# Altium PCB MCU.PcbDoc (part 2 of 3)
Units mm, origin at the board's own origin, x right, y up, seen from the top; angles counter-clockwise.
Board outline 91.45 x 80 mm, 4 copper layers (Top Layer, Layer 1, Layer 2, Bottom Layer), stack 1.586 mm thick; 92 components, 37 nets, 225 pads, 313 vias.
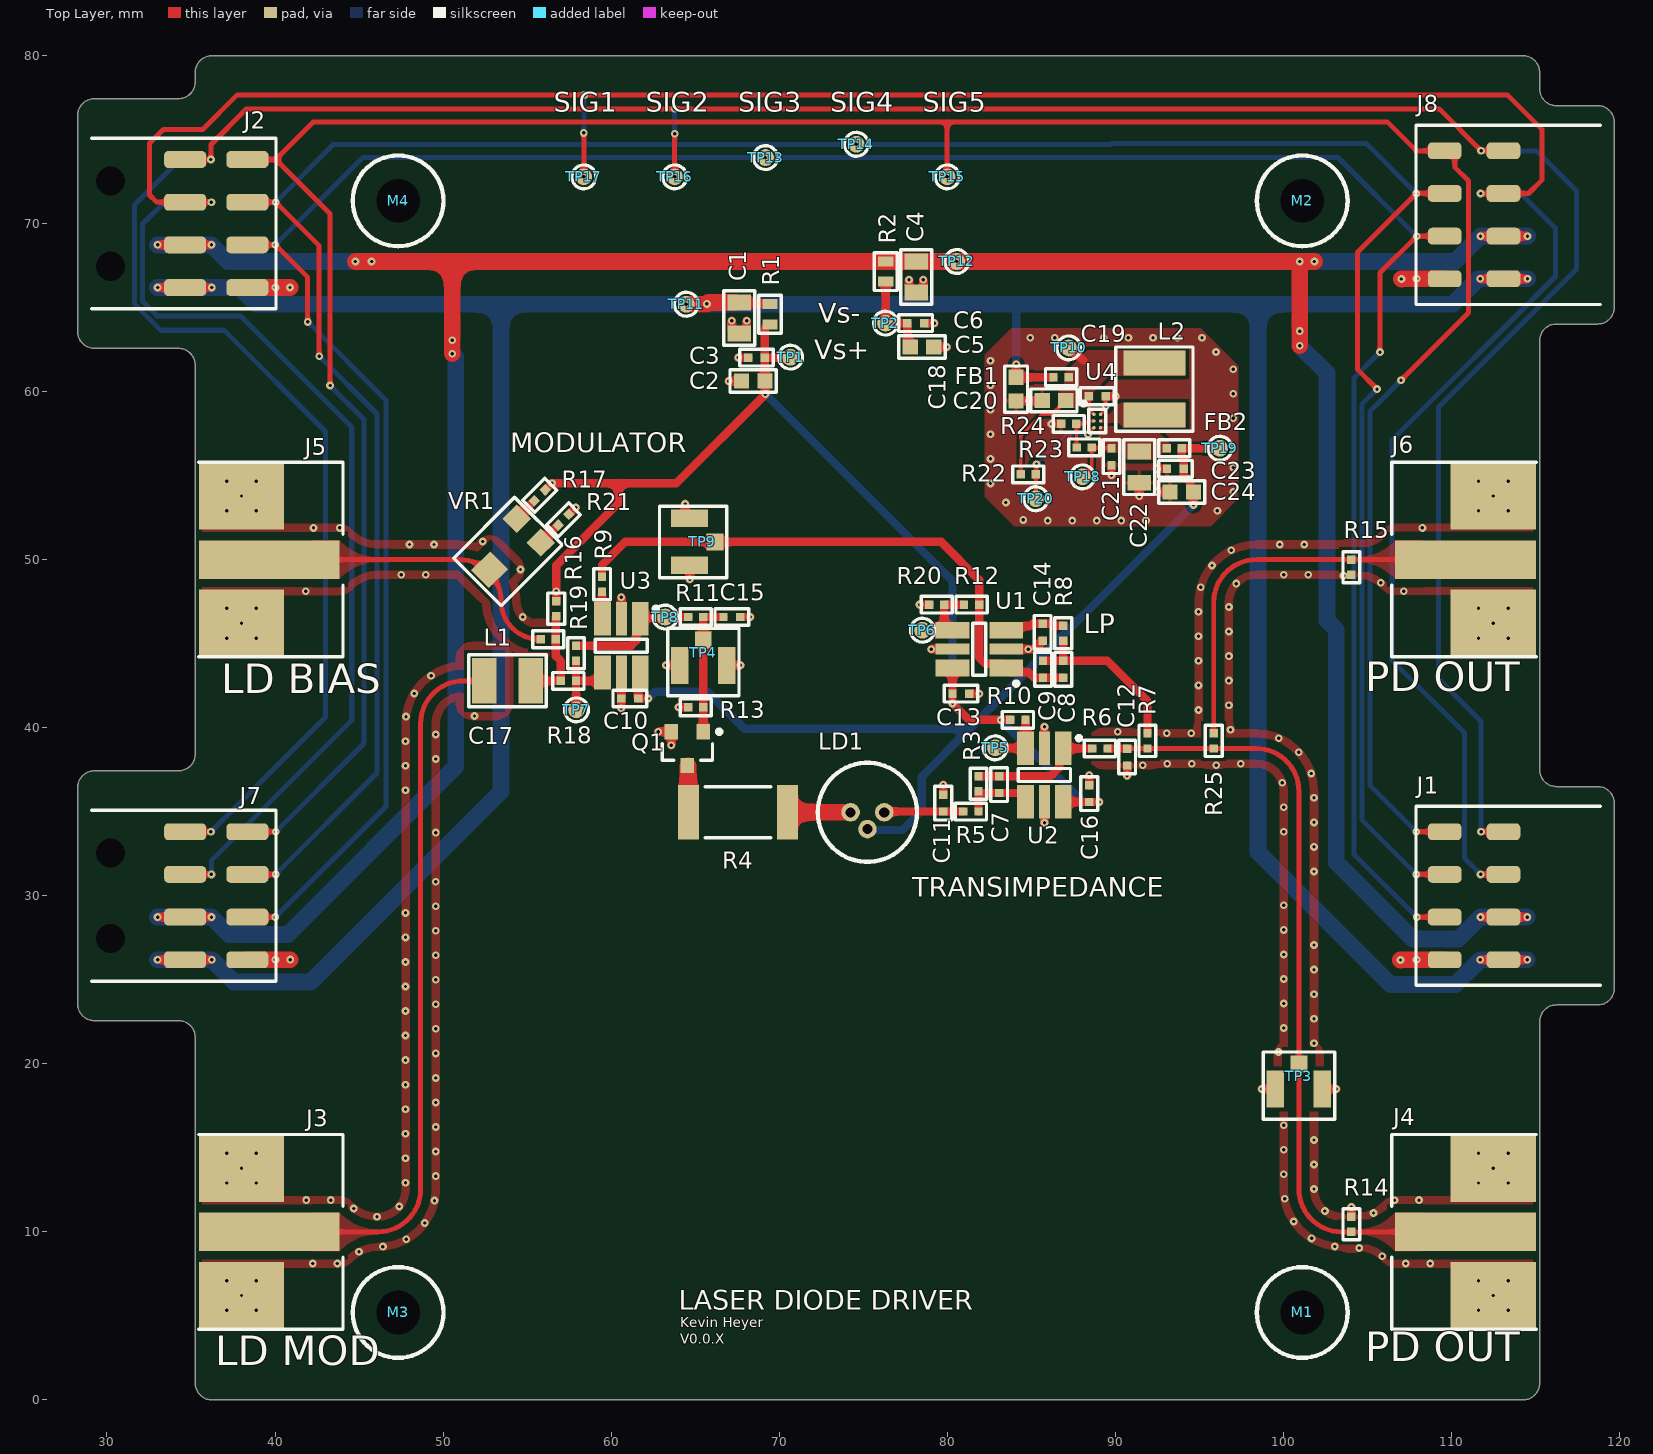
[diagram p0: Top Layer view]

## Part data (continued)
R10 R20: library part "RES 1k00 63mW 0402", "1 kOhms ¡À1% 0.063W, 1/16W Chip Resistor 0402 (1005 Metric) Moisture Resistant Thick Film", Case Code (Imperial)=0402, Case Code (Metric)=1005, Manufacturer=Yageo, Manufacturer Part Number=RC0402FR-071KL, Max Operating Temperature=155°C, Max Power Dissipation=63mW, Min Operating Temperature=-55°C, Power Rating=62.5mW, Resistance=1kR, Resistance Tolerance=1%, Resistor Type="Thick Film", Supplier Part Number 1=48Y4534, Temperature Coefficient=100ppm/°C, Voltage Rating=50V, Case/Package=0402, Category="Chip SMD Resistors", ComponentLink1Description=https://datasheet.ciiva.com/11819/0900766b80c66297-11819477.pdf?src-supplier=RSComponents, ComponentLink1URL=https://datasheet.ciiva.com/11819/0900766b80c66297-11819477.pdf?src-supplier=RSComponents, ComponentLink2Description=https://datasheet.ciiva.com/7983/1018594-7983502.pdf?src-supplier=Element14, ComponentLink2URL=https://datasheet.ciiva.com/7983/1018594-7983502.pdf?src-supplier=Element14, ComponentLink3Description=https://datasheet.ciiva.com/22747/1018594-22747513.pdf?src-supplier=Element14, ComponentLink3URL=https://datasheet.ciiva.com/22747/1018594-22747513.pdf?src-supplier=Element14, ComponentLink4Description=https://datasheet.ciiva.com/12666/pyu-rc0402-51-rohs-l-6-r-12666741.pdf?src-supplier=Mouser, ComponentLink4URL=https://datasheet.ciiva.com/12666/pyu-rc0402-51-rohs-l-6-r-12666741.pdf?src-supplier=Mouser, ComponentLink5Description=https://datasheet.ciiva.com/7849/1018594-7849869.pdf?src-supplier=Element14, ComponentLink5URL=https://datasheet.ciiva.com/7849/1018594-7849869.pdf?src-supplier=Element14, ComponentLink6Description=https://datasheet.ciiva.com/7849/1018594-7849871.pdf?src-supplier=Element14, ComponentLink6URL=https://datasheet.ciiva.com/7849/1018594-7849871.pdf?src-supplier=Element14, ComponentLink7Description=https://datasheet.ciiva.com/17063/pyu-rc0402-51-rohs-l-6-r-17063193.pdf?src-supplier=Future+Electronics, ComponentLink7URL=https://datasheet.ciiva.com/17063/pyu-rc0402-51-rohs-l-6-r-17063193.pdf?src-supplier=Future+Electronics, Construction=Rectangular, Depth=0.5mm, Features="Moisture Resistant", Height=0.32mm, Lead Free="Lead Free", Length=1mm, Military Standard=Not, Number of Pins=2, Number of Terminations=2, Packaging="Tape and Reel", Pricing 1="1=0.00100, 10000=0.00100 (USD)", Reach SVHC Compliant=Yes, RoHS=Yes, RoHS Compliant=Yes, Series=RC, Size Code=0402, Stock 1=3520000, Supplier 1=Newark, Technology="THICK FILM", Termination=SMD/SMT, Tolerance=1%, Voltage Rating (DC)=50V, Width=0.5mm
R11: library part "RES 100R 63mW 1% 0402", "Res General Purpose Thick Film 0402 100 Ohm 1% 1/16W ±100ppm/°C Molded SMD Paper T/R", Case Code (Imperial)=0402, Case Code (Metric)=1005, Manufacturer=Yageo, Manufacturer Part Number=RC0402FR-07100RL, Max Operating Temperature=155°C, Max Power Dissipation=63mW, Min Operating Temperature=-55°C, Power Rating=62.5mW, Resistance Tolerance=1%, Resistor Type="Thick Film", Supplier Part Number 1=45Y6897, Temperature Coefficient=100ppm/°C, Voltage Rating=50V, Case/Package=0402, Category="Chip SMD Resistors", ComponentLink1Description=https://datasheet.ciiva.com/11808/0900766b80c66297-11808765.pdf?src-supplier=RSComponents, ComponentLink1URL=https://datasheet.ciiva.com/11808/0900766b80c66297-11808765.pdf?src-supplier=RSComponents, ComponentLink2Description=https://datasheet.ciiva.com/7849/1784430-7849810.pdf?src-supplier=Element14, ComponentLink2URL=https://datasheet.ciiva.com/7849/1784430-7849810.pdf?src-supplier=Element14, ComponentLink3Description=https://datasheet.ciiva.com/28367/1018594-28367226.pdf?src-supplier=Element14, ComponentLink3URL=https://datasheet.ciiva.com/28367/1018594-28367226.pdf?src-supplier=Element14, ComponentLink4Description=https://datasheet.ciiva.com/22747/1018594-22747511.pdf?src-supplier=Element14, ComponentLink4URL=https://datasheet.ciiva.com/22747/1018594-22747511.pdf?src-supplier=Element14, ComponentLink5Description=https://datasheet.ciiva.com/12667/pyu-rc0402-51-rohs-l-6-r-12667957.pdf?src-supplier=Mouser, ComponentLink5URL=https://datasheet.ciiva.com/12667/pyu-rc0402-51-rohs-l-6-r-12667957.pdf?src-supplier=Mouser, ComponentLink6Description=https://datasheet.ciiva.com/15189/getdatasheetpartid-329466-15189335.pdf?src-supplier=Verical, ComponentLink6URL=https://datasheet.ciiva.com/15189/getdatasheetpartid-329466-15189335.pdf?src-supplier=Verical, ComponentLink7Description=https://datasheet.ciiva.com/16740/pyu-rc0402-51-rohs-l-6-r-16740566.pdf?src-supplier=Future+Electronics, ComponentLink7URL=https://datasheet.ciiva.com/16740/pyu-rc0402-51-rohs-l-6-r-16740566.pdf?src-supplier=Future+Electronics, Construction=Rectangular, Depth=0.5mm, Features="Moisture Resistant", Height=0.32mm, Lead Free="Lead Free", Length=1mm, Military Standard=Not, Number of Pins=2, Number of Terminations=2, Packaging="Tape and Reel", Pricing 1="1=0.00100, 10000=0.00100 (USD)", Reach SVHC Compliant=Yes, Resistance=100R, RoHS=Yes, RoHS Compliant=Yes, Series=RC, Size Code=0402, Stock 1=4390000, Supplier 1=Newark, Technology="THICK FILM", Termination=SMD/SMT, Tolerance=1%, Voltage Rating (DC)=50V, Width=0.5mm
R13 R16 R23: library part "RES 100k 1% 63mW 0402", "Res Thick Film 0402 100K Ohm 1% 0.063W ±100ppm/°C Molded SMD Paper T/R", Case Code (Imperial)=0402, Case Code (Metric)=1005, Manufacturer="Stackpole Electronics", Manufacturer Part Number=RMCF0402FT100K, Max Operating Temperature=155°C, Max Power Dissipation=63mW, Min Operating Temperature=-55°C, Power Rating=62.5mW, Resistance=100kR, Resistor Type="Thick Film", Temperature Coefficient=100ppm/°C, Tolerance=1%, Case/Package=0402, Category="Chip SMD Resistors", ComponentLink1Description=https://datasheet.ciiva.com/15193/getdatasheetpartid-482656-15193415.pdf?src-supplier=Verical, ComponentLink1URL=https://datasheet.ciiva.com/15193/getdatasheetpartid-482656-15193415.pdf?src-supplier=Verical, Construction=Rectangular, Contact Plating=Tin,Matte, Depth=0.5mm, Features="Automotive AEC-Q200", Height=0.016inch, Lead Free="Lead Free", Length=1mm, Military Standard=Not, Mount="Surface Mount", Number of Terminations=2, Packaging="Tape and Reel", Pricing 1="10000=0.00170, 20000=0.00168, 40000=0.00163, 60000=0.00160, 80000=0.00154, 100000=0.00150, 1000000=0.00146 (USD)", Radiation Hardening=No, RoHS=Yes, RoHS Compliant=Yes, Series=RMCF, Size Code=0402, Stock 1=3260000, Supplier 1=Avnet, Supplier Part Number 1=RMCF0402FT100K, Width=0.02inch
R14 R15: library part "RES GENERIC 0402"
R24: library part "RES 5k60 1% 63mW 0402", "Res Thick Film 0402 5.6K Ohm 1% 0.063W(1/16W) ±100ppm/C Epoxy SMD T/R", Case Code (Imperial)=0402, Case Code (Metric)=1005, Case/Package=Molded, Manufacturer=Yageo, Manufacturer Part Number=RC0402FR-075K6L, Max Operating Temperature=155°C, Min Operating Temperature=-55°C, Power Rating=62.5mW, Resistance=5.6kR, Resistance Tolerance=1%, Resistor Type="Thick Film", Supplier Part Number 1=12AC2081, Temperature Coefficient=100ppm/°C, Voltage Rating=50V, Category="Chip SMD Resistors", ComponentLink1Description=https://datasheet.ciiva.com/12667/pyu-rc0402-51-rohs-l-6-r-12667035.pdf?src-supplier=Mouser, ComponentLink1URL=https://datasheet.ciiva.com/12667/pyu-rc0402-51-rohs-l-6-r-12667035.pdf?src-supplier=Mouser, Construction=Rectangular, Depth=0.5mm, Lead Free="Lead Free", Length=1mm, Military Standard=Not, Packaging="Tape and Reel", Pricing 1="1=0.00100, 10000=0.00100 (USD)", RoHS=Yes, RoHS Compliant=Yes, Series=RC, Size Code=0402, Stock 1=100000, Supplier 1=Newark, Termination=SMD/SMT, Tolerance=1%
TP1 TP2 TP5 TP6 TP7 TP8 TP10 TP11 TP12 TP13 TP14 TP15 TP16 TP17 TP18 TP19 TP20: library part "TP 1mm", "SMT testpoint"
TP3 TP4 TP9: library part "TP U.FL", "CONN U.FL RCPT STR 50 OHM SMD", Case/Package=SMD/SMT, Dielectric Material=Polymer, Housing Color=Beige, Manufacturer=Hirose, Manufacturer Part Number=U.FL-R-SMT-1(80), Max Frequency=6GHz, Max Operating Temperature=90°C, Min Operating Temperature=-40°C, Package Quantity=10000, Body Material=Bronze, Body Plating=Silver, Category="RF / Coaxial Connectors", Center Contact Plating=Gold, ComponentLink1Description=http://www.mouser.com/ds/2/185/U.FL_catalog-939761.pdf?src-supplier=Mouser, ComponentLink1URL=http://www.mouser.com/ds/2/185/U.FL_catalog-939761.pdf?src-supplier=Mouser, ComponentLink2Description=https://www.hirose.com/product/en/download_file/key_name/U.FL-R-SMT-1%2880%29/category/Specification%20Sheet/doc_file_id/37638/?file_category_id=9&item_id=03310472280&is_series=&src-supplier=Digi-Key, ComponentLink2URL=https://www.hirose.com/product/en/download_file/key_name/U.FL-R-SMT-1%2880%29/category/Specification%20Sheet/doc_file_id/37638/?file_category_id=9&item_id=03310472280&is_series=&src-supplier=Digi-Key, Connector Type="Receptacle,Male Pin", Contact Material=Brass, Fastening Type=SNAP-ON, Impedance=50R, Lead Free="Lead Free", Mating Cycles=30, Mount="Surface Mount", Number of Ports=1, Packaging="Tape and Reel", Pricing 1="10000=0.81500, 20000=0.80000, 30000=0.78500 (USD)", RoHS=Yes, RoHS Compliant=Yes, Series=U.FL, Stock 1=40000, Supplier 1="Future Electronics", Termination=Solder
U1 U2 U3: library part "IC OPAMP SOT5/6-23 GENERIC", Case/Package=SOT, Category="Amplifiers - Op Amps, Buffer, Instrumentation", Mount="Surface Mount", Number of Channels=1, Number of Circuits=1, Number of Pins=6, RoHS=Yes, RoHS Compliant=Yes
U4: library part "IC REG BOOST 28V 1A2 TPS61046YFFR", "28-V Output Voltage Boost Converter in WCSP Package 6-DSBGA -40 to 125", Manufacturer="Texas Instruments", Max Operating Temperature=85°C, Min Operating Temperature=-40°C, Quiescent Current=110uA, Supplier Part Number 1=296-44337-1-ND, Category="Voltage Regulators - Switching", ComponentLink1Description=http://www.ti.com/lit/ds/symlink/tps61046.pdf?src-supplier=Digi-Key, ComponentLink1URL=http://www.ti.com/lit/ds/symlink/tps61046.pdf?src-supplier=Digi-Key, ComponentLink2Description=http://www.ti.com/general/docs/suppproductinfo.tsp?distId=10&amp;gotoUrl=http%3A%2F%2Fwww.ti.com%2Flit%2Fgpn%2Ftps61046&src-supplier=Digi-Key, ComponentLink2URL=http://www.ti.com/general/docs/suppproductinfo.tsp?distId=10&amp;gotoUrl=http%3A%2F%2Fwww.ti.com%2Flit%2Fgpn%2Ftps61046&src-supplier=Digi-Key, ComponentLink3Description=http://www.ti.com/general/docs/lit/getliterature.tsp?genericPartNumber=TPS61046&&fileType=pdf&src-supplier=Avnet, ComponentLink3URL=http://www.ti.com/general/docs/lit/getliterature.tsp?genericPartNumber=TPS61046&&fileType=pdf&src-supplier=Avnet, Lead Free="Lead Free", Manufacturer Part Number=TPS61046YFFR, Pricing 1="1=1.29000, 10=1.15700, 25=1.09800, 100=0.90210, 250=0.84324, 500=0.74518, 1000=0.58830 (USD)", RoHS=Yes, RoHS Compliant=Yes, Stock 1=82158, Supplier 1=Digi-Key, Topology=Boost
VR1: library part "RES POT 20k 1T 0.1W", "Res Trimmer 20K Ohm 25% 1/10W 1(Elec)/1(Mech)Turn (3 X 3.8mm) Foot Print SMD Embossed T/R", Manufacturer=Bourns, Manufacturer Part Number=TC33X-2-203E, Max Operating Temperature=100°C, Max Power Dissipation=100mW, Min Operating Temperature=-40°C, Package Quantity=2500, Resistance=20kR, Resistance Tolerance=25%, Resistor Type=Cermet, Supplier Part Number 1=TC33X-2-203ECT-ND, Temperature Coefficient=250ppm/°C, Category="Variable Resistors and Potentiometers", ComponentLink1Description=https://datasheet.ciiva.com/22671/1537288-22671216.pdf?src-supplier=Element14, ComponentLink1URL=https://datasheet.ciiva.com/22671/1537288-22671216.pdf?src-supplier=Element14, ComponentLink2Description=https://datasheet.ciiva.com/11833/0900766b802749b3-11833400.pdf?src-supplier=RSComponents, ComponentLink2URL=https://datasheet.ciiva.com/11833/0900766b802749b3-11833400.pdf?src-supplier=RSComponents, ComponentLink3Description=https://datasheet.ciiva.com/6227/tc33-6227117.pdf?src-supplier=Digi-Key, ComponentLink3URL=https://datasheet.ciiva.com/6227/tc33-6227117.pdf?src-supplier=Digi-Key, ComponentLink4Description=https://datasheet.ciiva.com/6227/tc33-6227118.pdf?src-supplier=Digi-Key, ComponentLink4URL=https://datasheet.ciiva.com/6227/tc33-6227118.pdf?src-supplier=Digi-Key, ComponentLink5Description=https://datasheet.ciiva.com/6227/tc33-6227119.pdf?src-supplier=Digi-Key, ComponentLink5URL=https://datasheet.ciiva.com/6227/tc33-6227119.pdf?src-supplier=Digi-Key, ComponentLink6Description=https://datasheet.ciiva.com/30078/tc33-30078556.pdf?src-supplier=Onlinecomponents.com, ComponentLink6URL=https://datasheet.ciiva.com/30078/tc33-30078556.pdf?src-supplier=Onlinecomponents.com, ComponentLink7Description=https://datasheet.ciiva.com/15156/getdatasheetpartid-128027-15156621.pdf?src-supplier=Verical, ComponentLink7URL=https://datasheet.ciiva.com/15156/getdatasheetpartid-128027-15156621.pdf?src-supplier=Verical, ComponentLink8Description=https://datasheet.ciiva.com/7953/1818686-7953350.pdf?src-supplier=Element14, ComponentLink8URL=https://datasheet.ciiva.com/7953/1818686-7953350.pdf?src-supplier=Element14, ComponentLink9Description=https://datasheet.ciiva.com/22718/1520225-22718588.pdf?src-supplier=Element14, ComponentLink9URL=https://datasheet.ciiva.com/22718/1520225-22718588.pdf?src-supplier=Element14, Depth=3.8mm, Height=0.047inch, Length=3mm, Military Standard=Not, Mount="Surface Mount", Number of Turns=1, Packaging="Tape and Reel", Power Rating=100mW, Pricing 1="1=0.26000, 10=0.25200, 25=0.22760, 50=0.21700, 100=0.21000, 250=0.19600, 500=0.17850, 1000=0.16100 (USD)", Radiation Hardening=No, REACH SVHC="No SVHC", RoHS=Yes, RoHS Compliant=Yes, Series=TC33, Stock 1=95244, Supplier 1=Digi-Key, Termination="Foot Print", Tolerance=25%, Width=0.118inch

## Via types
v1: diameter 0.46, hole 0.2, Top Layer to Bottom Layer, tented both sides, 313 vias